# EAGLE board ChronoCape_RevA (EAGLE 7.5.0)
REV: A
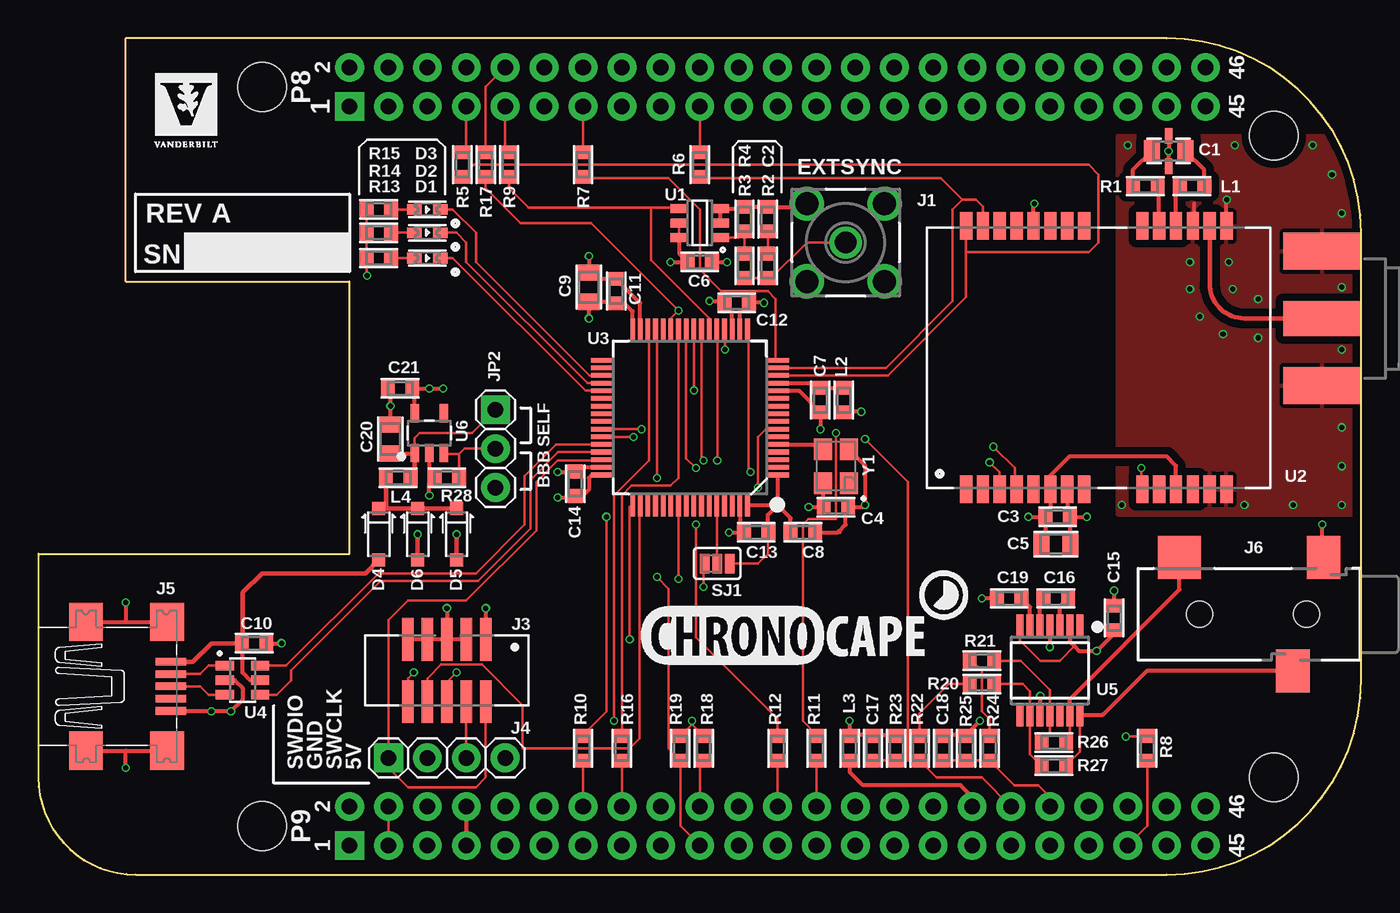
[diagram p0: board, top side]
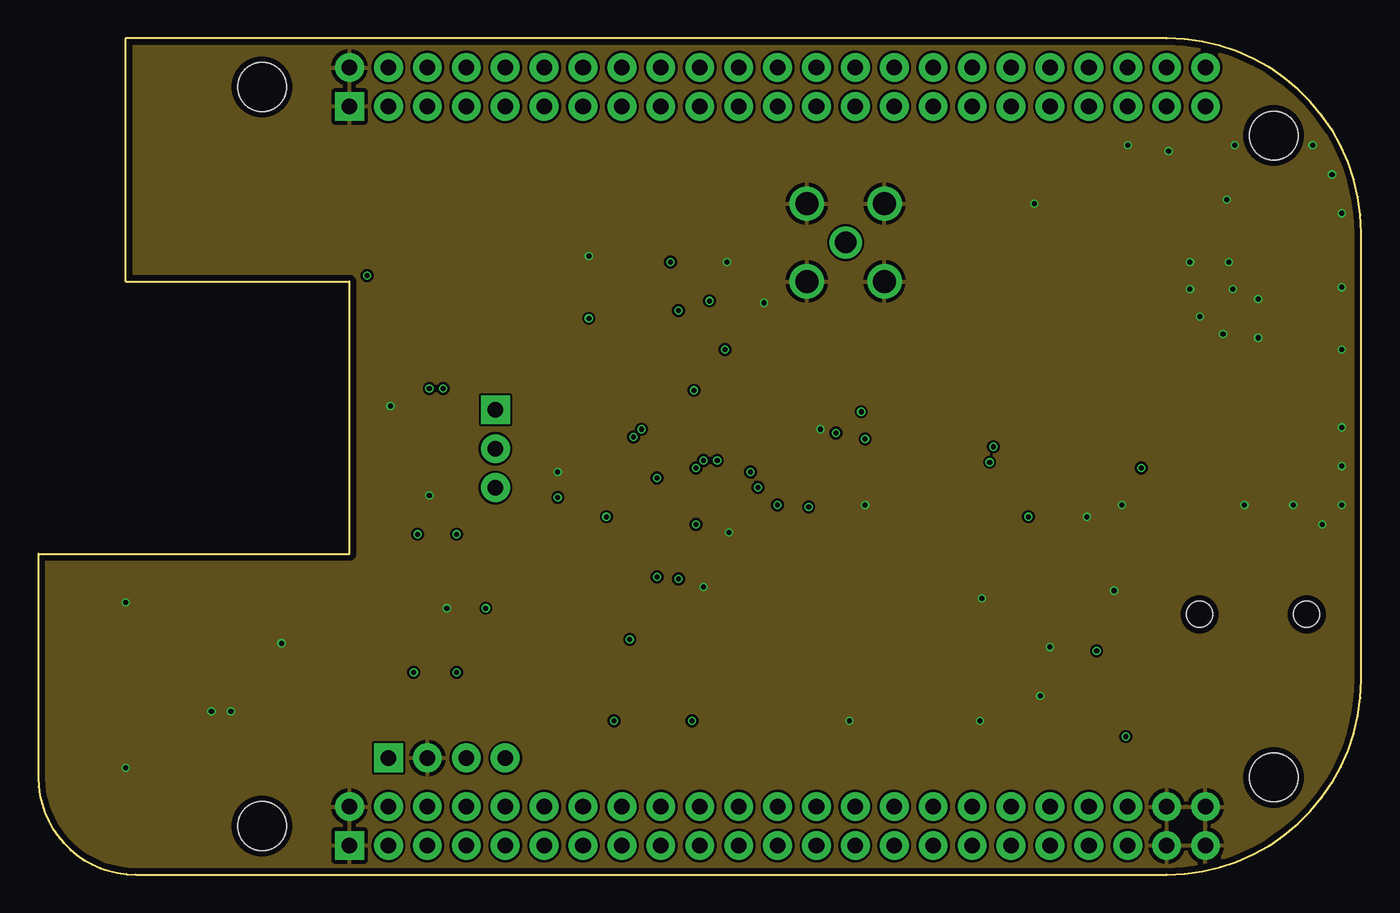
[diagram p1: board, inner layer Ground]
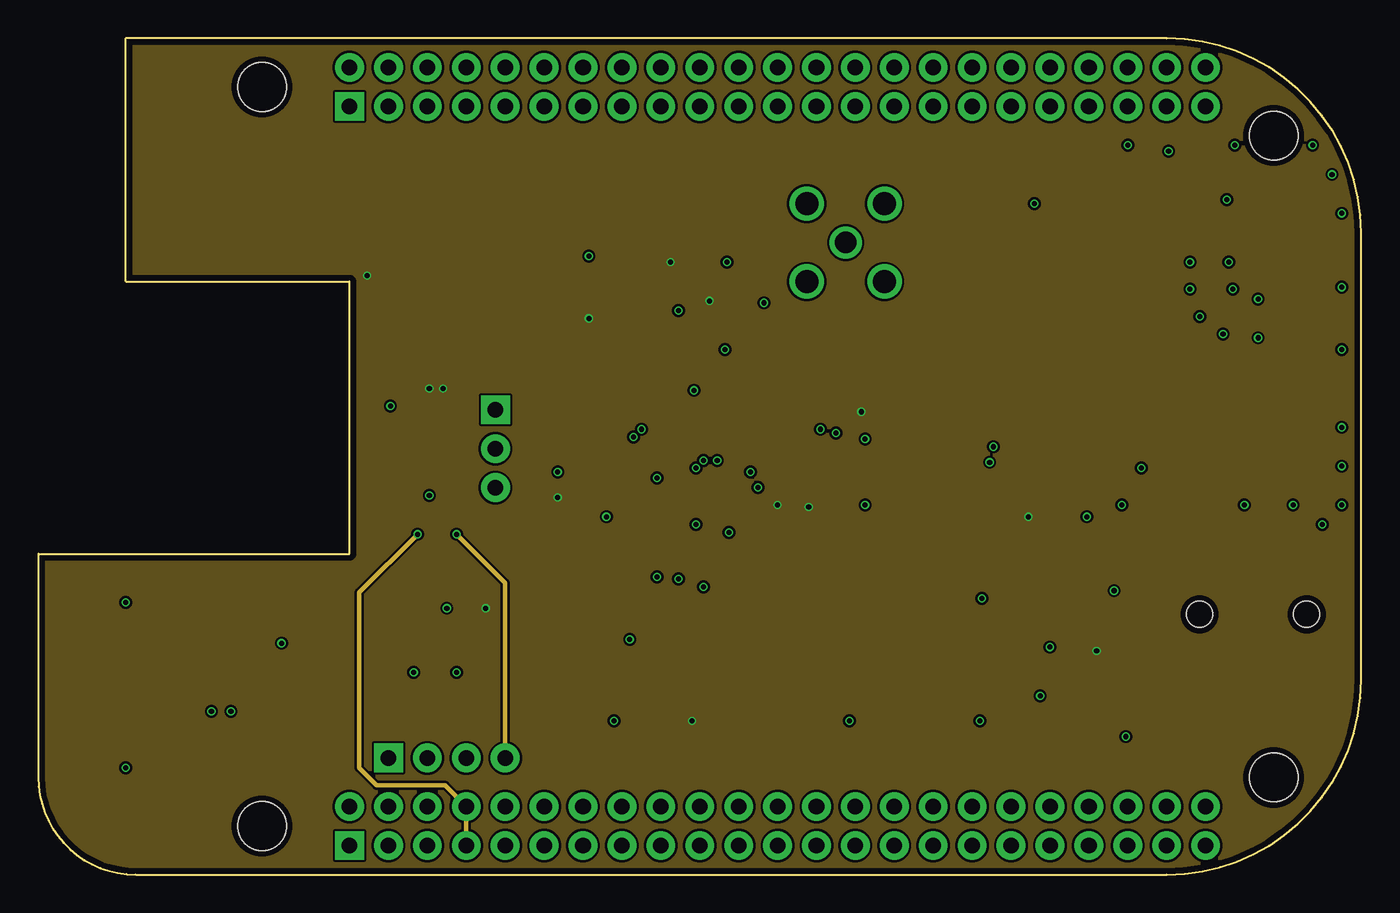
[diagram p2: board, inner layer Power]
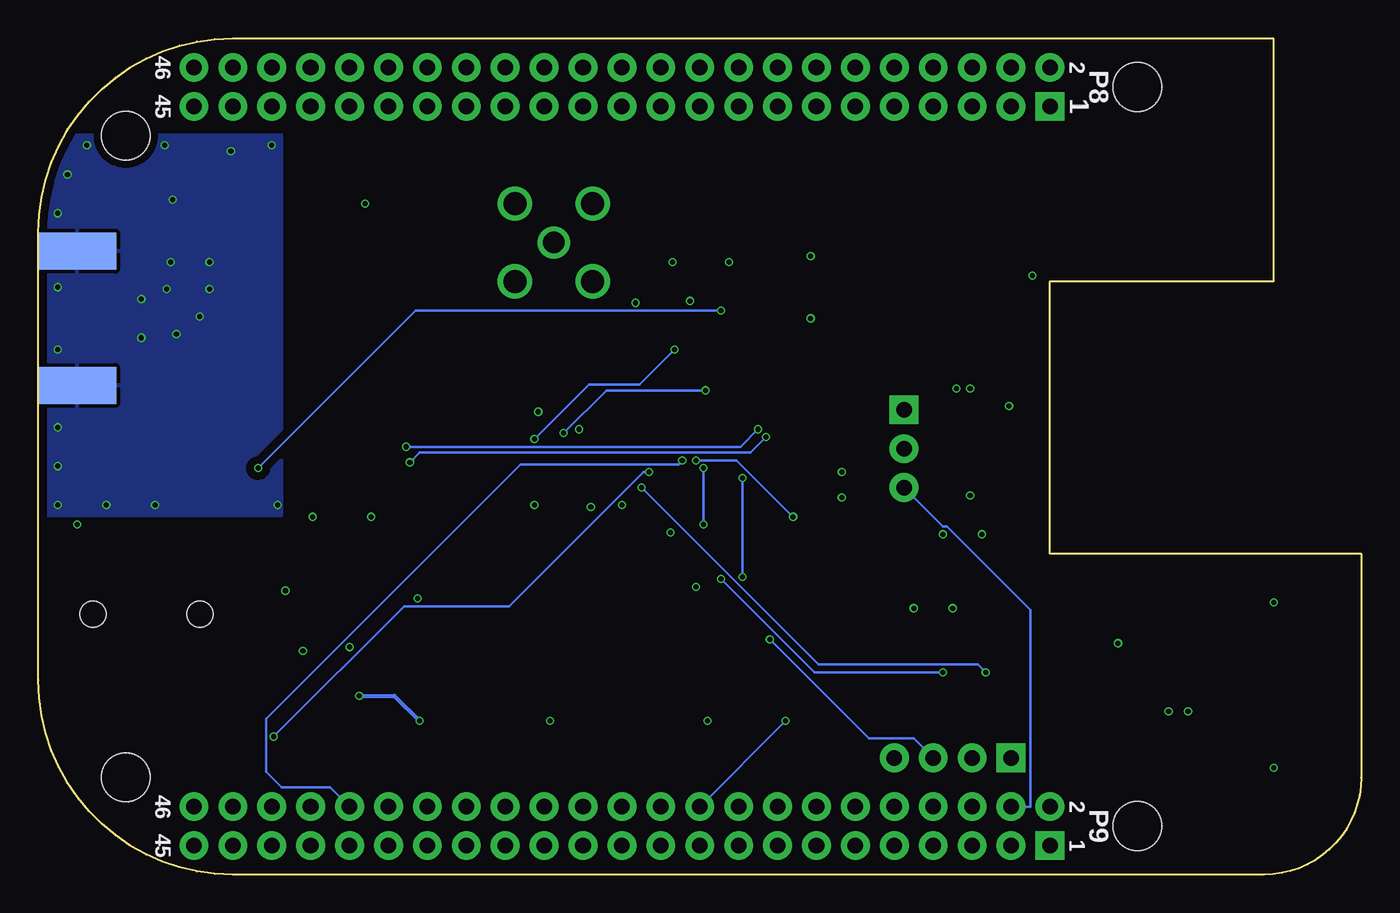
[diagram p3: board, bottom side, seen from below]

Size 86.36 x 54.61 mm. Coordinates in mm from the lower left corner, seen from the top.
Copper layers (1*2*15*16): Top 0.035559375mm / dielectric 0.17018125mm / Ground 0.01778125mm / dielectric 47mil / Power 0.01778125mm / dielectric 0.17018125mm / Bottom 0.035559375mm
Design rules "OSHPark-4layer": minimum track width 5mil, minimum drill 10mil, track to track 5mil, track to pad 5mil, pad to pad 5mil, via to via 5mil, smd to smd 5mil, copper to edge 15mil, drill to drill 6mil, minimum pad ring 4mil, minimum via ring 4mil, stop-mask expansion 2.5mil, vias tented up to drill 0mil, thermal gap 10mil
Net classes: 0 default: width 0.152 mm, drill 0.33 mm, clearance 0.152 mm; 1 power: width 0.254 mm, drill 0.33 mm, clearance 0.152 mm

## Footprints (pad centres in the part's own frame; a part is rotated, then mirrored left to right if it is on the bottom)
BEAGLE_BONE_BLACK_CAPE = drill 1.016 pad 1.88 square: P8.1 20.32,50.165; P9.1 20.32,1.905 | drill 1.016 pad 1.88: P8.2 20.32,52.705; P8.3 22.86,50.165; P8.4 22.86,52.705; P8.5 25.4,50.165; P8.6 25.4,52.705; P8.7 27.94,50.165; P8.8 27.94,52.705; P8.9 30.48,50.165; P8.10 30.48,52.705; P8.11 33.02,50.165; P8.12 33.02,52.705; P8.13 35.56,50.165; P8.14 35.56,52.705; P8.15 38.1,50.165; P8.16 38.1,52.705; P8.17 40.64,50.165; P8.18 40.64,52.705; P8.19 43.18,50.165; P8.20 43.18,52.705; P8.21 45.72,50.165; P8.22 45.72,52.705; P8.23 48.26,50.165; P8.24 48.26,52.705; P8.25 50.8,50.165; P8.26 50.8,52.705; P8.27 53.34,50.165; P8.28 53.34,52.705; P8.29 55.88,50.165; P8.30 55.88,52.705; P8.31 58.42,50.165; P8.32 58.42,52.705; P8.33 60.96,50.165; P8.34 60.96,52.705; P8.35 63.5,50.165; P8.36 63.5,52.705; P8.37 66.04,50.165; P8.38 66.04,52.705; P8.39 68.58,50.165; P8.40 68.58,52.705; P8.41 71.12,50.165; P8.42 71.12,52.705; P8.43 73.66,50.165; P8.44 73.66,52.705; P8.45 76.2,50.165; P8.46 76.2,52.705; P9.2 20.32,4.445; P9.3 22.86,1.905; P9.4 22.86,4.445; P9.5 25.4,1.905; P9.6 25.4,4.445; P9.7 27.94,1.905; P9.8 27.94,4.445; P9.9 30.48,1.905; P9.10 30.48,4.445; P9.11 33.02,1.905; P9.12 33.02,4.445; P9.13 35.56,1.905; P9.14 35.56,4.445; P9.15 38.1,1.905; P9.16 38.1,4.445; P9.17 40.64,1.905; P9.18 40.64,4.445; P9.19 43.18,1.905; P9.20 43.18,4.445; P9.21 45.72,1.905; P9.22 45.72,4.445; P9.23 48.26,1.905; P9.24 48.26,4.445; P9.25 50.8,1.905; P9.26 50.8,4.445; P9.27 53.34,1.905; P9.28 53.34,4.445; P9.29 55.88,1.905; P9.30 55.88,4.445; P9.31 58.42,1.905; P9.32 58.42,4.445; P9.33 60.96,1.905; P9.34 60.96,4.445; P9.35 63.5,1.905; P9.36 63.5,4.445; P9.37 66.04,1.905; P9.38 66.04,4.445; P9.39 68.58,1.905; P9.40 68.58,4.445; P9.41 71.12,1.905; P9.42 71.12,4.445; P9.43 73.66,1.905; P9.44 73.66,4.445; P9.45 76.2,1.905; P9.46 76.2,4.445 | hole 3.175: 14.605,3.175; 80.645,6.35; 80.645,48.26; 14.605,51.435
CTHROUGH0805 = smd 1.05 x 1.4: 1 -1.1,0; 2 1.1,0 | smd 0.5 x 1: GND$1 0,1; GND$2 0,-1
CHIP0603 = smd 0.9 x 1: 1 -0.8,0; 2 0.8,0
CHIP0805 = smd 1.05 x 1.4: 1 -0.95,0; 2 0.95,0
D0603 = smd 0.95 x 0.7: 1 -0.85,0; 2 0.85,0
SOD-123 = smd 0.85 x 0.85: A -1.675,0; C 1.675,0
SMA-THROUGH = drill 1.499: GND@0 -2.54,2.54; GND@1 -2.54,-2.54; GND@2 2.54,-2.54; GND@3 2.54,2.54 | drill 1.397: SIG 0,0
SMA-EDGE = smd 2.413 x 5.08: GND@0 -4.381,0; GND@1 4.381,0 | smd 2.413 x 5.08 bottom: GND@2 -4.381,0; GND@3 4.381,0 | smd 2.286 x 5.08: SIG 0,0
FTSH-105-01-L-DV-K = smd 0.737 x 2.794: 1 -2.54,-2.032; 2 -2.54,2.032; 3 -1.27,-2.032; 4 -1.27,2.032; 5 0,-2.032; 6 0,2.032; 7 1.27,-2.032; 8 1.27,2.032; 9 2.54,-2.032; 10 2.54,2.032
1X04 = drill 1.016 pad 1.88 square: 1 -3.81,0 | drill 1.016 pad 1.88: 2 -1.27,0; 3 1.27,0; 4 3.81,0
UX60A-MB-5ST = smd 2 x 0.5: 1 2.75,1.6; 2 2.75,0.8; 3 2.75,0; 4 2.75,-0.8; 5 2.75,-1.6 | smd 2.2 x 2.5: SHLD@1 -2.8,4.2; SHLD@2 2.5,4.2; SHLD@3 2.5,-4.2; SHLD@4 -2.8,-4.2
SJ-3523-SMT = smd 2.2 x 2.8: 1 -1.1,-3.7; 3 0.9,3.7 | smd 2.8 x 2.8: 2 8.3,-3.7 | hole 1.7: 0,0; 7,0
1X03 = drill 1.016 pad 1.88 square: 1 -2.54,0 | drill 1.016 pad 1.88: 2 0,0; 3 2.54,0
SJ_3_PASTE1&2 = smd 0.635 x 1.27: 1 -0.813,0; 2 0,0; 3 0.813,0
SOT23-6 = smd 1.1 x 0.6: 1 -1.35,0.95; 2 -1.35,0; 3 -1.35,-0.95; 4 1.35,-0.95; 5 1.35,0; 6 1.35,0.95
LEA-6 = smd 1.8 x 0.8: 1 -8.5,8.65; 2 -8.5,7.55; 3 -8.5,6.45; 4 -8.5,5.35; 5 -8.5,4.25; 6 -8.5,3.15; 7 -8.5,2.05; 8 -8.5,0.95; 9 -8.5,-2.85; 10 -8.5,-3.95; 11 -8.5,-5.05; 12 -8.5,-6.15; 13 -8.5,-7.25; 14 -8.5,-8.35; 15 8.7,-8.35; 16 8.7,-7.25; 17 8.7,-6.15; 18 8.7,-5.05; 19 8.7,-3.95; 20 8.7,-2.85; 21 8.7,0.95; 22 8.7,2.05; 23 8.7,3.15; 24 8.7,4.25; 25 8.7,5.35; 26 8.7,6.45; 27 8.7,7.55; 28 8.7,8.65
LQFP64 = smd 1.5 x 0.3: 1 -5.7,3.75; 2 -5.7,3.25; 3 -5.7,2.75; 4 -5.7,2.25; 5 -5.7,1.75; 6 -5.7,1.25; 7 -5.7,0.75; 8 -5.7,0.25; 9 -5.7,-0.25; 10 -5.7,-0.75; 11 -5.7,-1.25; 12 -5.7,-1.75; 13 -5.7,-2.25; 14 -5.7,-2.75; 15 -5.7,-3.25; 16 -5.7,-3.75; 33 5.7,-3.75; 34 5.7,-3.25; 35 5.7,-2.75; 36 5.7,-2.25; 37 5.7,-1.75; 38 5.7,-1.25; 39 5.7,-0.75; 40 5.7,-0.25; 41 5.7,0.25; 42 5.7,0.75; 43 5.7,1.25; 44 5.7,1.75; 45 5.7,2.25; 46 5.7,2.75; 47 5.7,3.25; 48 5.7,3.75 | smd 0.3 x 1.5: 17 -3.75,-5.7; 18 -3.25,-5.7; 19 -2.75,-5.7; 20 -2.25,-5.7; 21 -1.75,-5.7; 22 -1.25,-5.7; 23 -0.75,-5.7; 24 -0.25,-5.7; 25 0.25,-5.7; 26 0.75,-5.7; 27 1.25,-5.7; 28 1.75,-5.7; 29 2.25,-5.7; 30 2.75,-5.7; 31 3.25,-5.7; 32 3.75,-5.7; 49 3.75,5.7; 50 3.25,5.7; 51 2.75,5.7; 52 2.25,5.7; 53 1.75,5.7; 54 1.25,5.7; 55 0.75,5.7; 56 0.25,5.7; 57 -0.25,5.7; 58 -0.75,5.7; 59 -1.25,5.7; 60 -1.75,5.7; 61 -2.25,5.7; 62 -2.75,5.7; 63 -3.25,5.7; 64 -3.75,5.7
SOT23-6L = smd 1.2 x 0.6: 1 -1.15,0.95; 2 -1.15,0; 3 -1.15,-0.95; 4 1.15,-0.95; 5 1.15,0; 6 1.15,0.95
TSSOP14 = smd 1.5 x 0.45: 1 -2.9,1.95; 2 -2.9,1.3; 3 -2.9,0.65; 4 -2.9,0; 5 -2.9,-0.65; 6 -2.9,-1.3; 7 -2.9,-1.95; 8 2.9,-1.95; 9 2.9,-1.3; 10 2.9,-0.65; 11 2.9,0; 12 2.9,0.65; 13 2.9,1.3; 14 2.9,1.95
SOT23-5 = smd 1.2 x 0.55: 1 -1.3,0.95; 2 -1.3,0; 3 -1.3,-0.95; 4 1.3,-0.95; 5 1.3,0.95
SMD_3.2X2.5 = smd 1.4 x 1.2: 1 -1.1,-0.85; 2 1.1,-0.85; 3 1.1,0.85; 4 -1.1,0.85

## Placement (x,y rotation side)
BBB1  BEAGLE_BONE_BLACK_CAPE  [BEAGLE_BONE_BLACK_CAPE]  0,0 0 top
C1  470p  [CTHROUGH0805]  73.79,47.24 0 top
C2  1000pF  [CHIP0603]  47.62,42.8 90 top
C3  0.1uF  [CHIP0603]  66.55,23.37 0 top
C4  0.01uF  [CHIP0603]  52.07,24 0 top
C5  10uF  [CHIP0805]  66.42,21.59 0 top
C6  0.1uF  [CHIP0603]  43.18,40.01 0 top
C7  1uF  [CHIP0603]  51.05,30.99 90 top
C8  1uF  [CHIP0603]  49.91,22.35 0 top
C9  10uF  [CHIP0805]  35.94,38.35 90 top
C10  0.1uF  [CHIP0603]  14.1,15.11 0 top
C11  0.1uF  [CHIP0603]  37.72,38.1 90 top
C12  0.1uF  [CHIP0603]  45.59,37.34 0 top
C13  0.1uF  [CHIP0603]  46.86,22.35 180 top
C14  0.1uF  [CHIP0603]  35.05,25.53 90 top
C15  1uF  [CHIP0603]  70.23,16.76 90 top
C16  1uF  [CHIP0603]  66.42,18.03 180 top
C17  680pF  [CHIP0603]  54.48,8.26 90 top
C18  680pF  [CHIP0603]  59.05,8.26 90 top
C19  1uF  [CHIP0603]  63.37,18.03 180 top
C20  10uF  [CHIP0805]  22.99,28.45 90 top
C21  1uF  [CHIP0603]  23.62,31.75 180 top
D1  598-8010-107F  [D0603]  25.4,40.26 180 top
D2  598-8070-107F  [D0603]  25.4,41.91 180 top
D3  598-8030-107F  [D0603]  25.4,43.43 180 top
D4  B0520LW  [SOD-123]  22.23,22.23 90 top
D5  B0520LW  [SOD-123]  27.3,22.23 90 top
D6  B0520LW  [SOD-123]  24.77,22.23 90 top
J1  CONSMA001-G  [SMA-THROUGH]  52.7,41.27 180 top
J2  0732511150  [SMA-EDGE]  83.82,36.32 270 top
J3  FTSH-105-01-L-DV-K  [FTSH-105-01-L-DV-K]  26.67,13.34 180 top
J4  68000-204HLF  [1X04]  26.67,7.62 0 top
J5  UX60A-MB-5ST  [UX60A-MB-5ST]  5.92,12.3 0 top
J6  CON_STEREO_JACK_SJ-3523-SMT  [SJ-3523-SMT]  82.8,17 180 top
JP2  68000-203HLF  [1X03]  29.84,27.81 270 top
L1  600R@100MHz  [CHIP0603]  75.31,44.96 180 top
L2  BKP1608HS330  [CHIP0603]  52.58,30.99 270 top
L3  BKP1608HS330  [CHIP0603]  52.96,8.26 270 top
L4  BKP1608HS330  [CHIP0603]  23.5,25.91 0 top
LOGO1  LOGO_CHRONOCAPE  [LOGO_CHRONOSCAPE]  39.37,13.34 0 top
LOGO2  LOGO_VANDERBILT280MIL  [LOGO_VANDERBILT_280MIL]  7.62,52.32 0 top
R1  10R, 1/5W, 5%  [CHIP0603]  72.26,44.96 180 top
R2  49.9  [CHIP0603]  47.62,39.75 270 top
R3  1k  [CHIP0603]  46.1,39.75 90 top
R4  2k  [CHIP0603]  46.1,42.8 270 top
R5  200  [CHIP0603]  27.69,46.35 270 top
R6  200  [CHIP0603]  43.18,46.35 270 top
R7  200  [CHIP0603]  35.56,46.35 270 top
R8  200  [CHIP0603]  72.39,8.26 90 top
R9  200  [CHIP0603]  30.73,46.35 270 top
R10  200  [CHIP0603]  35.56,8.26 90 top
R11  200  [CHIP0603]  50.8,8.26 90 top
R12  200  [CHIP0603]  48.26,8.26 90 top
R13  200  [CHIP0603]  22.23,40.26 180 top
R14  200  [CHIP0603]  22.23,41.91 180 top
R15  200  [CHIP0603]  22.23,43.43 180 top
R16  200  [CHIP0603]  38.1,8.26 90 top
R17  200  [CHIP0603]  29.21,46.35 270 top
R18  10k  [CHIP0603]  43.43,8.26 90 top
R19  10k  [CHIP0603]  41.91,8.26 90 top
R20  10k  [CHIP0603]  61.59,12.45 0 top
R21  10k  [CHIP0603]  61.59,13.97 0 top
R22  20k  [CHIP0603]  57.53,8.26 90 top
R23  24k  [CHIP0603]  56.01,8.26 270 top
R24  20k  [CHIP0603]  62.1,8.26 90 top
R25  24k  [CHIP0603]  60.58,8.26 270 top
R26  10k  [CHIP0603]  66.29,8.64 180 top
R27  10k  [CHIP0603]  66.29,7.11 180 top
R28  10k  [CHIP0603]  26.67,25.91 180 top
SJ1  SOLDERJUMPER_2WAYPASTE1&2  [SJ_3_PASTE1&2]  44.32,20.32 0 top
U1  SN74AUP1T57DBV  [SOT23-6]  43.18,42.55 180 top
U2  LEA-6T  [LEA-6]  69.22,33.66 90 top
U3  STM32L476RG  [LQFP64]  42.55,29.84 180 top
U4  USBLC6-2SC6  [SOT23-6L]  13.34,12.7 0 top
U5  NCP2811A  [TSSOP14]  66.04,13.34 270 top
U6  LP5907MFX-3.3  [SOT23-5]  25.53,28.83 90 top
Y1  ASTX-H11-20.000MHZ-T  [SMD_3.2X2.5]  52.07,26.67 90 top

## Library data of the parts
BBB1 C1-C21 D1-D6 J1-J6 JP2 L1-L4 LOGO1 LOGO2 R1-R28 SJ1 U1-U3 U5 U6 Y1 = EAGLENEST
U4 = EAGLENEST; DIGI-KEY#: 497-5235-1-ND; MF: STMicroelectronics; MPN: USBLC6-2SC6

## Nets
+3V3 [power]: C3.1 C4.1 C5.1 C6.1 C8.1 C9.1 C11.1 C12.1 C13.1 C14.1 C15.1 C21.1 J3.1 L2.2 R13.2 R14.2 R15.2 R18.2 R19.2 SJ1.3 U1.5 U1.6 U2.6 U2.11 U3.1 U3.19 U3.32 U3.48 U3.64 U5.2 U5.7 U6.5 Y1.4
AGND [power]: BBB1.P9.34 L3.2
AIN3: BBB1.P9.38 C18.1 R24.1 R25.2 U3.21
AIN5: BBB1.P9.36 C17.1 R22.1 R23.2 U3.20
CLKOUT2: BBB1.P9.41 R8.1
DAC1_OUT1: R20.1 R22.2
DAC1_OUT2: R21.1 R24.2
EHRPWM1A: BBB1.P9.14 R10.1
EHRPWM1B: BBB1.P9.16 R16.1
EHRPWM2A: BBB1.P8.19 R6.1
EHRPWM2B: BBB1.P8.13 R7.1
EXTSYNC: R9.2 U1.4 U3.22
GND [power]: BBB1.P8.1 BBB1.P8.2 BBB1.P9.1 BBB1.P9.2 BBB1.P9.43 BBB1.P9.44 BBB1.P9.45 BBB1.P9.46 C1.GND$1 C1.GND$2 C2.2 C3.2 C4.2 C5.2 C6.2 C7.1 C8.2 C9.2 C10.2 C11.2 C12.2 C13.2 C14.2 C15.2 C17.2 C18.2 C19.2 C20.2 C21.2 J1.GND@0 J1.GND@1 J1.GND@2 J1.GND@3 J2.GND@0 J2.GND@1 J2.GND@2 J2.GND@3 J3.3 J3.5 J3.7 J3.9 J4.2 J5.5 J5.SHLD@1 J5.SHLD@2 J5.SHLD@3 J5.SHLD@4 J6.1 L3.1 R4.1 R23.1 R25.1 R28.2 SJ1.1 U1.2 U1.3 U2.7 U2.13 U2.14 U2.15 U2.17 U2.24 U3.12 U3.18 U3.31 U3.47 U3.63 U4.2 U5.4 U5.10 U6.2 Y1.2
GPS_EXTINT: R6.2 U2.27 U3.15
GPS_RXD: U2.4 U3.42
GPS_TIMEPULSE: R5.2 U2.28 U3.14
GPS_TIMEPULSE2: R17.2 U2.9 U3.27
GPS_TXD: U2.3 U3.43
I2C2_SCL: BBB1.P9.19 R19.1 U3.29
I2C2_SDA: BBB1.P9.20 R18.1 U3.30
JTAG_5V [power]: D5.A J4.4
LED_GREEN: D2.1 U3.36
LED_RED: D1.1 U3.37
LED_SYNC: D3.1 U3.35
N$1: C2.1 R2.1
N$2: J1.SIG R2.2 R3.1
N$3 [power]: C7.2 L2.1 U3.13
N$4: R3.2 R4.2 U1.1
N$5 [power]: C20.1 JP2.1 L4.2 U6.1
N$6: D1.2 R13.1
N$7: D2.2 R14.1
N$8 [power]: L1.2 U2.18
N$9 [power]: D4.C D5.C D6.C L4.1
N$10: D3.2 R15.1
N$11: J2.SIG U2.16
N$12: C1.2 L1.1
N$13 [power]: R1.1 U2.19
N$14: C1.1 R1.2
N$15: J5.2 U4.1
N$18: SJ1.2 U3.60
N$19: C16.1 U5.3
N$20: C16.2 U5.5
N$21: J6.2 R26.1 U5.13
N$22: R20.2 R27.2 U5.9
N$23: R21.2 R26.2 U5.11
N$24: J5.3 U4.3
N$25: J6.3 R27.1 U5.14
N$28: R7.2 U3.16
N$30: R10.2 U3.23
N$31: R11.2 U3.24
N$32: R12.2 U3.25
N$33: R16.2 U3.26
N$35: R8.2 U3.17
NRST: J3.10 U3.7
OUT: U3.5 Y1.3
PVM: C19.1 U5.6
PWR_EN: JP2.2 R28.1 U6.3
SWDCLK/TCK: J3.4 J4.3 U3.49
SWDIO/TMS: J3.2 J4.1 U3.46
SWO/TDO: J3.6 U3.55
SYS_5V [power]: BBB1.P9.7 BBB1.P9.8 D6.A
TDI: J3.8 U3.50
TIMER4: BBB1.P8.7 R5.1
TIMER5: BBB1.P8.9 R9.1
TIMER6: BBB1.P8.10 R17.1
UART1_RXD: BBB1.P9.26 R11.1
UART1_TXD: BBB1.P9.24 R12.1
USB_DM: U3.44 U4.6
USB_DP: U3.45 U4.4
VBUS [power]: C10.1 D4.A J5.1 U4.5
VCC_OUT: U2.8
VDD_3V3B: BBB1.P9.3 BBB1.P9.4 JP2.3

## Tracks (layer width: path | path; a pad name or v marks a point on that pad's centre or on a via)
+3V3  (via drill 0.33)
  Top 0.152: R19.2 42.67,9.82 | R18.2 42.67,9.82 | 42.67,9.82 v42.67,10.03 | U5.7 64.09,15.29 65.41,13.97 66.67,13.97 67.63,14.92 | U1.6 U1.5 | SJ1.3 46.99,20.32 47.62,20.95 47.62,22.31 C13.1 | v21.46,39.12 21.43,39.15 R13.2 R14.2 R15.2
  Top 0.254: U6.5 24.58,31.59 C21.1 v25.53,31.75 v26.42,31.75 | C3.1 66.06,23.37 U2.6 66.06,26.06 67.31,27.3 73.66,27.3 74.27,26.7 U2.11 | C3.1 65.75,21.59 C5.1 | v64.64,23.37 C3.1 | v53.72,30.23 52.62,30.23 L2.2 | Y1.4 51.27,25.52 C4.1 v50.29,24 | U5.2 67.34,15.21 67.63,14.92 67.94,14.61 v69.09,14.61 70.23,15.75 C15.1 | U1.6 41.83,40.55 C6.1 v41.27,40.01 | v35.94,36.32 C9.1 37.62,37.4 C11.1 38.27,37.3 38.8,36.77 U3.32 | U3.48 36.13,26.09 35.94,25.91 35.94,25.15 35.56,24.77 35.09,24.77 C14.1 34.96,24.64 v33.91,24.64 | C13.1 47.62,22.39 47.62,23.5 v48.26,24.13 | C8.1 49.11,23.28 v48.26,24.13 | U3.1 48.24,24.14 | U3.64 48.24,24.14 | 48.24,24.14 v48.26,24.13 | U3.19 45.3,36.84 C12.1 | 44.83,37.38 C12.1 | v29.21,17.4 J3.1 | v43.81,37.47 44.67,37.47 C12.1
  pour Power: 0,54.61 86.36,54.61 86.36,0 0,0
AGND
  Top 0.254: BBB1.P9.34 60.96,5.08 60.2,5.84 53.85,5.84 52.96,6.73 L3.2
AIN3  (via drill 0.33)
  Top 0.152: BBB1.P9.38 66.04,5.08 65.28,5.84 63.72,5.84 R24.1 R25.2 C18.1 | v44.32,27.05 44.32,35.43 U3.21
  Bottom 0.152: v44.32,27.05 44.58,26.8 54.86,26.8 71.5,10.16 71.5,6.73 70.48,5.71 67.31,5.71 BBB1.P9.38
AIN5  (via drill 0.33)
  Top 0.152: BBB1.P9.36 61.59,6.35 58.64,6.35 R22.1 56.77,7.46 | 56.77,7.46 R23.2 C17.1 | v44.83,34.29 44.83,35.43 U3.20 | v53.98,28.45 56.77,25.65 56.77,7.46
  Bottom 0.152: v44.83,34.29 47.12,32 50.42,32 v53.98,28.45
CLKOUT2
  Top 0.152: R8.1 72.39,3.17 BBB1.P9.41
DAC1_OUT1
  Top 0.152: R20.1 59.44,12.45 57.53,10.54 R22.2
DAC1_OUT2
  Top 0.152: R21.1 60.96,13.97 61.59,13.34 61.59,10.67 62.1,10.16 R24.2
EHRPWM1A
  Top 0.152: R10.1 BBB1.P9.14
EHRPWM1B
  Top 0.152: R16.1 BBB1.P9.16
EHRPWM2A
  Top 0.152: BBB1.P8.19 R6.1
EHRPWM2B
  Top 0.152: BBB1.P8.13 R7.1
EXTSYNC
  Top 0.152: 40.01,43.56 41.78,43.56 U1.4 | 30.73,45.47 R9.2 30.73,44.83 32,43.56 40.01,43.56 | U3.22 43.8,36.34 40.01,40.13 40.01,43.56
GND  (via drill 0.33)
  Top 0.152: 46,43.49 R4.1 | v43.43,18.8 43.43,20.24 SJ1.1
  Top 0.254: U4.2 12.83,12.7 13.34,12.19 13.34,11.43 v12.57,10.67 12.54,10.7 J5.5 | J5.SHLD@1 5.71,16.5 | 5.71,16.5 J5.SHLD@2 | J5.SHLD@4 5.71,8.1 | 5.71,8.1 J5.SHLD@3 | v5.71,6.99 5.71,8.1 | v5.71,17.78 5.71,16.5 | C10.2 v15.88,15.11 | U6.2 25.53,26.25 R28.2 25.53,25.57 v25.53,24.77 | C20.2 v22.99,30.61 22.99,31.59 C21.2 | 73.79,48.39 C1.GND$1 v73.79,47.24 C1.GND$2 | U2.7 67.17,23.37 C3.2 | C3.2 67.35,21.59 C5.2 | C3.2 v68.45,23.37 | C7.1 v51.05,29.08 | Y1.2 53.98,26.71 v53.98,24.13 53.85,24 C4.2 52.7,23.84 52.7,22.86 52.26,22.42 | U2.15 77.56,44.04 v77.6,44.07 | 75.44,43.81 75.44,42.43 U2.17 | J6.1 83.82,20.78 v83.82,22.86 | C19.2 v61.59,18.03 | U5.4 v66.04,14.86 | U5.10 65.41,10.45 v65.41,11.68 | C15.2 v70.23,18.54 | J1.GND@2 49.95,43.6 C2.2 R4.1 | 46,43.49 U1.3 U1.2 | C6.2 v44.96,40.01 | v35.94,40.39 C9.2 36.34,38.9 C11.2 39.3,37.32 U3.31 | U3.47 35.32,26.59 C14.2 35.01,26.29 v33.91,26.29 | U3.63 45.8,22.62 C13.2 v45.09,22.35 | C8.2 52.2,22.35 52.26,22.42 | U3.18 45.8,36.74 C12.2 v47.37,37.34 | U2.24 64.97,43.76 v65.02,43.81 | C7.1 50.71,30.19 | U3.12 49.65,31.59 C7.1 | 24.13,15.88 J3.9 J3.7 J3.5 | J3.3 J3.5 | v26.67,17.4 J3.5 | 54.48,9.02 C17.2 54.48,9.14 | 54.48,9.14 56.01,9.14 R23.1 | 60.58,9.14 59.05,9.14 C18.2 | v61.47,10.03 60.58,9.14 | 60.58,9.14 R25.1 | 52.32,22.35 52.26,22.42 | v52.96,10.03 L3.1 53.17,9.14 54.48,9.14
  Bottom 0.254: v61.47,10.03 63.12,11.68 v65.41,11.68
  other vias: 11.3,10.67 85.09,43.18 85.09,29.21 78.74,24.13 83.19,47.62 85.09,38.35 85.09,34.29 85.09,26.67 85.09,24.13 81.92,24.13 84.45,45.72 78.11,47.62 70.74,24.13 77.72,40.01 79.63,37.59 77.98,38.23 79.63,35.05 75.18,40.01 75.18,38.23 75.82,36.45 77.34,35.31 71.12,47.62
  pour Ground: 0,54.61 86.36,54.61 86.36,0 0,0
  pour Top (isolate 0.508): 70.48,48.26 86.36,48.26 86.36,23.5 70.48,23.5
  pour Bottom (isolate 0.508): 70.48,48.26 86.36,48.26 86.36,23.5 70.48,23.5
GPS_EXTINT
  Top 0.152: U3.15 55.32,33.09 59.69,37.47 59.69,43.43 60.33,44.07 | U2.27 61.66,43.62 61.21,44.07 60.33,44.07 | R6.2 43.18,45.47 58.93,45.47 60.33,44.07
GPS_RXD  (via drill 0.33)
  Top 0.152: v39.37,29.08 36.96,29.08 U3.42 | U2.4 63.75,25.27 63.75,26.54 v62.36,27.94
  Bottom 0.152: v39.37,29.08 40.51,27.94 v62.36,27.94
GPS_TIMEPULSE
  Top 0.152: U3.14 55.45,32.59 60.56,37.7 60.56,40.64 | U2.28 60.56,40.64 | R5.2 27.69,45.59 28.45,46.35 68.58,46.35 69.22,45.72 69.22,41.27 68.58,40.64 60.56,40.64
GPS_TIMEPULSE2  (via drill 0.33)
  Top 0.152: U3.27 41.27,35.56 41.27,36.32 v41.78,36.83 36.07,42.55 31.5,42.55 29.21,44.83 R17.2 | v72.01,26.54 72.01,25.27 U2.9
  Bottom 0.152: v72.01,26.54 61.72,36.83 v41.78,36.83
GPS_TXD  (via drill 0.33)
  Top 0.152: v38.86,28.57 36.96,28.57 U3.43 | U2.3 62.74,25.27 62.74,26.29 v62.1,26.92
  Bottom 0.152: v38.86,28.57 39.88,27.56 61.47,27.56 v62.1,26.92
I2C2_SCL  (via drill 0.33)
  Top 0.152: BBB1.P9.19 41.91,3.17 R19.1 41.91,7.49 41.15,8.26 41.15,18.67 v40.39,19.43 | v40.39,25.91 40.39,35.43 U3.29
  Bottom 0.152: v40.39,19.43 v40.39,25.91
I2C2_SDA  (via drill 0.33)
  Top 0.152: BBB1.P9.20 43.18,7.2 R18.1 | v37.59,10.03 37.59,24.77 39.88,27.05 39.88,35.43 U3.30
  Bottom 0.152: BBB1.P9.20 v37.59,10.03
JTAG_5V  (via drill 0.33)
  Top 0.305: v27.3,22.23 D5.A
  Power 0.305: J4.4 30.48,19.05 v27.3,22.23
LED_GREEN
  Top 0.152: D2.1 27.3,41.91 27.94,41.27 27.94,40.01 35.85,32.09 U3.36
LED_RED
  Top 0.152: D1.1 27.05,40.26 35.72,31.59 U3.37
LED_SYNC
  Top 0.152: D3.1 27.05,43.43 28.57,41.91 28.57,40.01 35.98,32.59 U3.35
N$1
  Top 0.152: R2.1 C2.1
N$2
  Top 0.152: J1.SIG 50.16,41.27 47.84,38.95 R2.2 R3.1
N$3
  Top 0.254: C7.2 L2.1 | 50.87,31.97 C7.2 | U3.13 50.75,32.09 C7.2
N$4
  Top 0.152: R3.2 R4.2 45.7,41.59 U1.1
N$5
  Top 0.152: U6.1 24.58,28.51 24.89,28.83 28.32,28.83 JP2.1
  Top 0.254: 24.58,26.19 L4.2 | C20.1 24.55,27.5 U6.1
  Top 0.305: U6.1 24.58,26.19
N$6
  Top 0.152: R13.1 D1.2
N$7
  Top 0.152: R14.1 D2.2
N$8
  Top 0.254: U2.18 74.27,44.71 L1.2
N$9
  Top 0.254: 22.7,23.9 D4.C
  Top 0.305: D5.C D6.C D4.C | L4.1 22.7,23.9
N$10
  Top 0.152: R15.1 D3.2
N$11
  Top 0.305: U2.16 76.47,38.6 arc90 78.74,36.32 J2.SIG
N$12
  Top 0.254: L1.1 76.11,46.02 C1.2
N$13
  Top 0.254: U2.19 73.17,44.86 R1.1
N$14
  Top 0.254: R1.2 71.46,46.02 C1.1
N$15
  Top 0.152: J5.2 10.56,13.1 11.11,13.65 U4.1
N$18
  Top 0.152: U3.60 44.3,20.35 SJ1.2
N$19
  Top 0.254: U5.3 66.69,17.5 C16.1
N$20
  Top 0.254: U5.5 65.39,17.8 C16.2
N$21
  Top 0.152: U5.13 67.34,8.88 R26.1
  Top 0.254: U5.13 67.34,11.46 74.5,18.62 J6.2
N$22
  Top 0.152: R27.2 64.74,7.87 U5.9 64.74,11.97 64.26,12.45 R20.2
N$23
  Top 0.152: R26.2 66.04,9.18 U5.11 66.04,12.06 64.14,13.97 R21.2
N$24
  Top 0.152: J5.3 10.56,12.3 11.11,11.75 U4.3
N$25
  Top 0.152: U5.14 67.99,8.01 R27.1
  Top 0.254: J6.3 72.36,13.3 69.49,10.44 U5.14
N$28
  Top 0.152: 35.56,45.47 R7.2 35.65,45.47 41.15,45.47 43.18,43.43 43.18,39.5 44.58,38.1 47.62,38.1 48.13,37.59 48.13,33.66 U3.16
N$30  (via drill 0.33)
  Top 0.152: v37.08,23.37 37.08,10.67 35.56,9.14 R10.2 | v43.43,27.05 43.31,27.18 43.31,35.43 U3.23
  Bottom 0.152: v37.08,23.37 40.77,27.05 v43.43,27.05
N$31  (via drill 0.33)
  Top 0.152: v52.07,28.83 52.07,23.24 50.29,23.24 49.91,22.86 49.91,10.03 50.8,9.14 R11.2 | v42.8,31.62 42.8,35.43 U3.24
  Bottom 0.152: v52.07,28.83 49.28,31.62 v42.8,31.62
N$32  (via drill 0.33)
  Top 0.152: v42.93,22.86 42.93,15.49 47.62,10.79 47.94,10.48 48.26,10.16 R12.2 | v42.93,26.54 42.29,27.18 42.29,35.43 U3.25
  Bottom 0.152: v42.93,26.54 v42.93,22.86
N$33
  Top 0.152: R16.2 38.1,24.77 38.73,25.4 41.27,25.4 41.78,25.91 41.78,35.43 U3.26
N$35  (via drill 0.33)
  Top 0.152: v70.99,9.02 72.39,9.02 R8.2 | v46.48,26.29 46.35,26.42 46.35,35.43 U3.17
  Bottom 0.152: v70.99,9.02 62.48,17.53 55.63,17.53 46.86,26.29 v46.48,26.29
NRST  (via drill 0.33)
  Top 0.152: U3.7 48.13,29.08 47.5,29.08 46.99,28.57 v46.99,25.27 | J3.10 24.13,12.83 v24.51,13.21
  Bottom 0.152: v46.99,25.27 35.43,13.72 25.02,13.72 v24.51,13.21
OUT
  Top 0.152: 50.9,28.09 Y1.3
  Top 0.254: U3.5 50.9,28.09
PVM
  Top 0.254: U5.6 64.74,17.47 C19.1
PWR_EN
  Top 0.152: JP2.2 27.81,27.81 27.47,27.47 | R28.1 27.47,27.47 | 27.47,27.47 26.54,27.47 U6.3
SWDCLK/TCK  (via drill 0.33)
  Top 0.152: J3.4 J4.3 | v38.61,15.37 38.61,24 38.73,24.13 U3.49
  Bottom 0.152: v38.61,15.37 32.13,8.89 29.21,8.89 J4.3
SWDIO/TMS
  Top 0.152: J3.2 29.21,6.35 28.57,5.71 24.13,5.71 22.86,6.99 J4.1 22.86,16.64 24.13,17.91 27.94,17.91 32.51,22.48 32.51,25.65 33.91,27.05 36.83,27.05 U3.46
SWO/TDO  (via drill 0.33)
  Top 0.152: v41.78,19.3 41.78,24.13 U3.55 | J3.6 26.67,12.57 v27.3,13.21
  Bottom 0.152: v41.78,19.3 35.69,13.21 v27.3,13.21
SYS_5V  (via drill 0.33)
  Top 0.254: BBB1.P9.8 BBB1.P9.7
  Top 0.305: v24.77,22.23 D6.A
  Power 0.305: BBB1.P9.8 26.54,5.84 22.1,5.84 20.95,6.99 20.95,18.41 v24.77,22.23 | BBB1.P9.7 27.94,3.81
TDI
  Top 0.152: U3.50 39.24,24.13 39.24,8.89 38.61,8.26 31.62,8.26 31.62,11.05 28.96,13.72 26.29,13.72 25.4,12.83 J3.8
TIMER4
  Top 0.152: BBB1.P8.7 27.94,47.41 R5.1
TIMER5
  Top 0.152: BBB1.P8.9 30.48,47.41 R9.1
TIMER6
  Top 0.152: BBB1.P8.10 29.21,51.44 R17.1
UART1_RXD
  Top 0.152: R11.1 BBB1.P9.26
UART1_TXD
  Top 0.152: R12.1 BBB1.P9.24
USB_DM
  Top 0.152: U4.6 16.19,13.65 22.23,19.68 28.57,19.68 31.75,22.86 31.75,26.04 33.81,28.09 U3.44
USB_DP
  Top 0.152: U4.4 15.56,11.75 16.51,12.7 16.51,13.34 22.35,19.18 28.7,19.18 32.13,22.61 32.13,25.78 33.95,27.59 U3.45
VBUS
  Top 0.254: U4.5 13.84,12.7 13.34,13.21 13.34,15.07 C10.1 13.34,15.15
  Top 0.305: D4.A 21.36,19.68 14.61,19.68 13.34,18.41 13.34,15.15 | J5.1 10.09,13.9 11.3,15.11 C10.1
VDD_3V3B
  Top 0.152: BBB1.P9.4 BBB1.P9.3
  Bottom 0.152: JP2.3 27.3,22.73 27.05,22.73 21.59,17.27 21.59,4.45 BBB1.P9.4

## Text on the board
tPlace: EXTSYNC | REV | SN | SELF | BBB | SWDIO | GND | SWCLK | 5V